# EAGLE board lab_sist_dig (EAGLE 9.6.2)

Size 87.3 x 100.32 mm. Coordinates in mm from the lower left corner, seen from the top.
Outline: 0,0 87.3,0 87.3,100.32 0,100.32 0,0
Copper layers (1*16): Top 0.035mm / dielectric 1.5mm / Bottom 0.035mm
Design rules "default": minimum track width 6mil, minimum drill 0.35mm, track to track 6mil, track to pad 6mil, pad to pad 6mil, via to via 6mil, smd to smd 6mil, copper to edge 40mil, drill to drill 6mil, minimum pad ring 10mil, minimum via ring 8mil, stop-mask expansion 4mil, vias tented up to drill 0mil, thermal gap 10mil
Net classes: 0 default: clearance 0.205 mm

## Footprints (pad centres in the part's own frame; a part is rotated, then mirrored left to right if it is on the bottom)
1X10-BIG = drill 1.016 pad 1.778 octagon: 1 -11.43,0; 2 -8.89,0; 3 -6.35,0; 4 -3.81,0; 5 -1.27,0; 6 1.27,0; 7 3.81,0; 8 6.35,0; 9 8.89,0; 10 11.43,0
320-916 = drill 2.007 long: 1 0,4.013; 2 0,0; 3 0,-4.013
MEGA2560_MIKRO = drill 1 octagon: 3V3.1 -26.67,-17.78; 3V3.2 -26.67,-20.32; +5V.1 -29.21,-17.78; +5V.2 -29.21,-20.32; A0 -21.59,15.24; A1 -21.59,12.7; A2 -19.05,15.24; A3 -19.05,12.7; A4 -16.51,15.24; A5 -16.51,12.7; A6 -13.97,15.24; A7 -13.97,12.7; A8 -11.43,15.24; A9 -11.43,12.7; A10 -8.89,15.24; A11 -8.89,12.7; A12 -6.35,15.24; A13 -6.35,12.7; A14 -3.81,15.24; A15 -3.81,12.7; AREF.1 -24.13,-17.78; D2 -19.05,-17.78; D3 -19.05,-20.32; D4 -16.51,-17.78; D5 -16.51,-20.32; D6 -13.97,-17.78; D7 -13.97,-20.32; D8 -11.43,-17.78; D9 -11.43,-20.32; D10 -8.89,-17.78; D11 -8.89,-20.32; D12 -6.35,-17.78; D13 -6.35,-20.32; D14 -3.81,-17.78; D15 -3.81,-20.32; D16 -1.27,-17.78; D17 -1.27,-20.32; D18 1.27,-17.78; D19 1.27,-20.32; D20 3.81,-17.78; D21 3.81,-20.32; D22 6.35,-17.78; D23 6.35,-20.32; D24 8.89,-17.78; D25 8.89,-20.32; D26 11.43,-17.78; D27 11.43,-20.32; D28 13.97,-17.78; D29 13.97,-20.32; D30 16.51,-17.78; D31 16.51,-20.32; D32 -1.27,15.24; D33 -1.27,12.7; D34 1.27,15.24; D35 1.27,12.7; D36 3.81,15.24; D37 3.81,12.7; D38 6.35,15.24; D39 6.35,12.7; D40 8.89,15.24; D41 8.89,12.7; D42 11.43,15.24; D43 11.43,12.7; D44 13.97,15.24; D45 13.97,12.7; D46 16.51,15.24; D47 16.51,12.7; D48 16.51,10.16; D49 13.97,10.16; D50 16.51,7.62; D51 13.97,7.62; D52 16.51,5.08; D53 13.97,5.08; GND.1 -31.75,-17.78; GND.2 -31.75,-20.32; RST -24.13,-20.32; RX -21.59,-17.78; TX -21.59,-20.32; VIN.1 -34.29,-17.78; VIN.2 -34.29,-20.32
ENC28J60 = drill 1.016 octagon: CLK 1.27,2.54; CS 1.27,-5.08; GND 3.81,-7.62; NT 3.81,2.54; RST 3.81,-5.08; SCK 3.81,-2.54; SI 1.27,-2.54; SO 3.81,0; VCC 1.27,-7.62; WOL 1.27,0
AK300/2 = drill 1.321 long: 1 -2.515,0; 2 2.489,0

## Placement (x,y rotation side)
OUT_CYCLONE_II  PINHD-1X10  [1X10-BIG]  62.23,48.26 90 top
OUT_CYCLONE_IV  PINHD-1X10  [1X10-BIG]  34.29,25.4 0 top
S1  [320-916]  6.35,10.16 0 top
U$1  MEGA2560_MIKRO  [MEGA2560_MIKRO]  38.1,54.61 0 top
U$2  ENC28J60  [ENC28J60]  52.07,87.63 180 top
U$3  PINHD-1X10  [1X10-BIG]  16.51,78.74 0 top
U$4  PINHD-1X10  [1X10-BIG]  78.74,48.26 90 top
U$5  PINHD-1X10  [1X10-BIG]  74.93,48.26 90 top
U$6  PINHD-1X10  [1X10-BIG]  34.29,8.89 0 top
U$7  PINHD-1X10  [1X10-BIG]  34.29,12.7 0 top
U$8  PINHD-1X10  [1X10-BIG]  43.18,78.74 0 top
U$9  PINHD-1X10  [1X10-BIG]  71.12,78.74 0 top
U$10  PINHD-1X10  [1X10-BIG]  78.74,17.78 90 top
U$11  PINHD-1X10  [1X10-BIG]  74.93,17.78 90 top
UART  PINHD-1X10  [1X10-BIG]  62.23,17.78 90 top
X1  [AK300/2]  8.89,25.4 270 top

## Library data of the parts
OUT_CYCLONE_II OUT_CYCLONE_IV U$3-U$11 UART = adafruit
S1 = switch
U$1 = MIKRO_MEGA2560
U$2 = ethernet-mikroavr
X1 = con-ptr500; OC_FARNELL: unknown; OC_NEWARK: unknown